# EAGLE board NyanTimer-v4 (EAGLE 9.2.2)
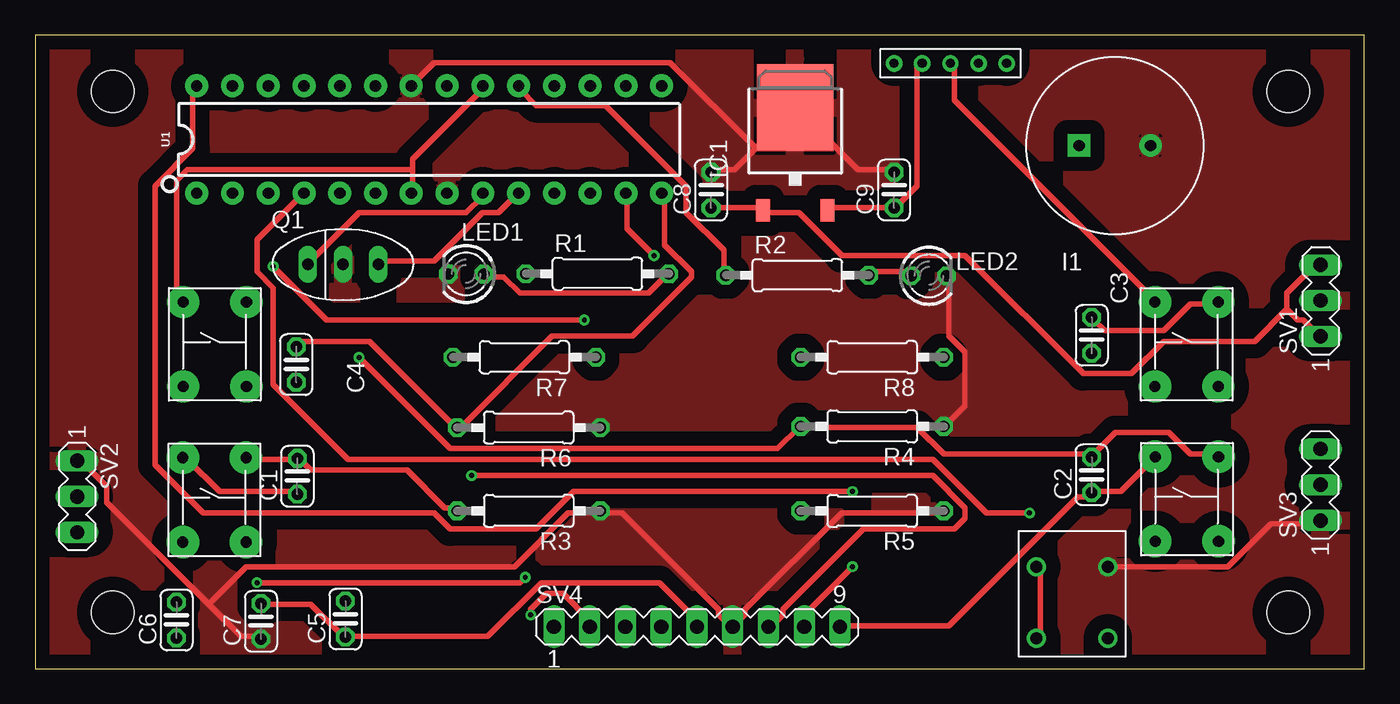
[diagram p0: board, top side]
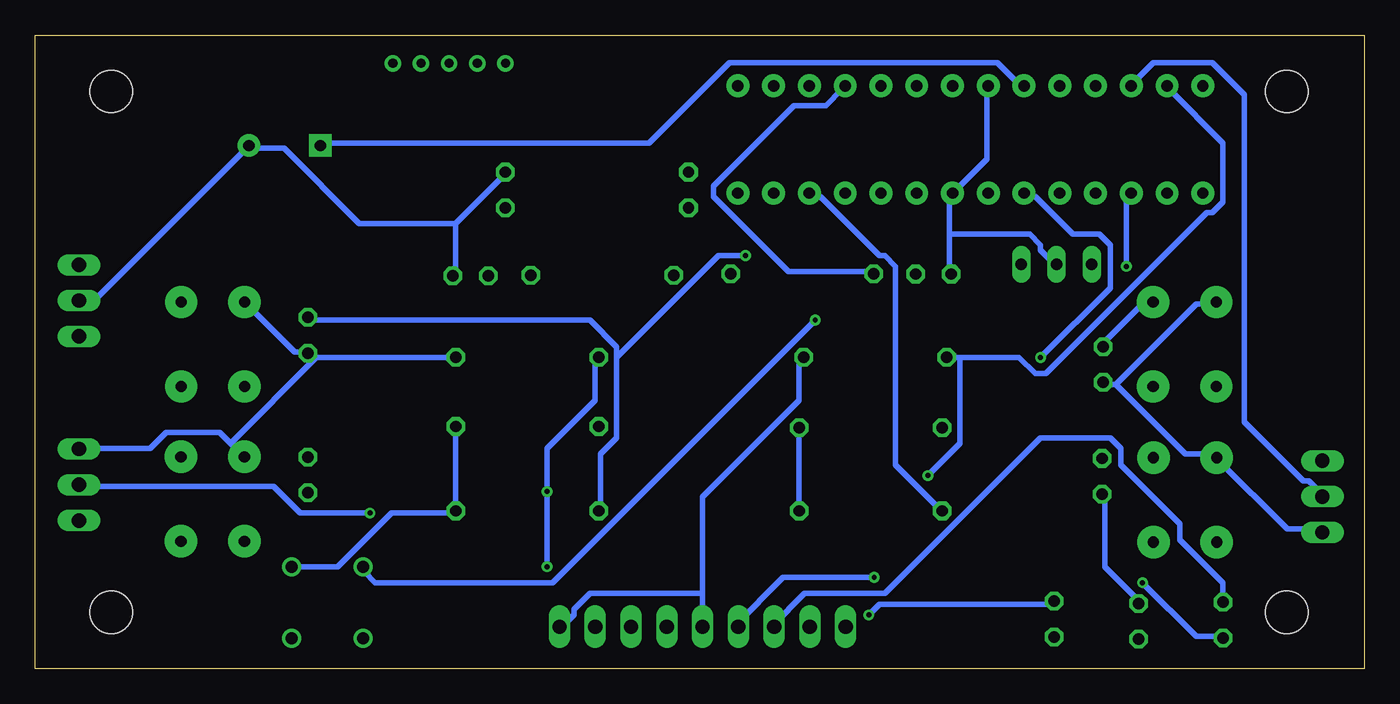
[diagram p1: board, bottom side, seen from below]

Size 94.4 x 45 mm. Coordinates in mm from the lower left corner, seen from the top.
Outline: 0,0 94.4,0 94.4,45 0,45 0,0
Copper layers (1*16): Top 0.035mm / dielectric 1.5mm / Bottom 0.035mm
Design rules "default": minimum track width 6mil, minimum drill 0.35mm, track to track 6mil, track to pad 6mil, pad to pad 6mil, via to via 6mil, smd to smd 6mil, copper to edge 40mil, drill to drill 6mil, minimum pad ring 10mil, minimum via ring 8mil, stop-mask expansion 4mil, vias tented up to drill 0mil, thermal gap 10mil
Net classes: 0 default: width 0.381 mm, clearance 0.381 mm
Holes 3 mm at 5.5,41 5.5,4 89,41 89,4

## Footprints (pad centres in the part's own frame; a part is rotated, then mirrored left to right if it is on the bottom)
C025-024X044 = drill 0.813 octagon: 1 -1.27,0; 2 1.27,0
TACT_SWITCH = drill 0.8 pad 2.3: 1 0,0; 2 4.5,0; 3 0,6; 4 4.5,6
PKM13EPYH4000 = drill 0.8 pad 1.6 square: 1 0,0 | drill 0.8 pad 1.6: 2 5.08,0
TO252 = smd 1 x 1.6: 1 -2.28,-4.8; 2 2.28,-4.8 | smd 5.4 x 6.2: 3 0,2.5
LED3MM = drill 0.813 octagon: A -1.27,0; K 1.27,0
PHONE = drill 0.85: GND 0,-5.08; PIN1 5.08,-5.08; PIN2 0,0; PIN3 5.08,0
CSTLA_T = drill 0.813 long: 1 -2.5,0; 2 0,0; 3 2.5,0
0207/10 = drill 0.813 octagon: 1 -5.08,0; 2 5.08,0
MA03-1 = drill 1.016 long: 1 -2.54,0; 2 0,0; 3 2.54,0
MA09-1 = drill 1.016 long: 1 -10.16,0; 2 -7.62,0; 3 -5.08,0; 4 -2.54,0; 5 0,0; 6 2.54,0; 7 5.08,0; 8 7.62,0; 9 10.16,0
AKIZUKI_SWITCH = drill 0.65: PIN1 2,0; PIN2 4,0; PIN3 6,0; SIDE1 0,0; SIDE2 8,0
DIP28 = drill 0.813 pad 1.626: 1 -16.51,-3.81; 2 -13.97,-3.81; 3 -11.43,-3.81; 4 -8.89,-3.81; 5 -6.35,-3.81; 6 -3.81,-3.81; 7 -1.27,-3.81; 8 1.27,-3.81; 9 3.81,-3.81; 10 6.35,-3.81; 11 8.89,-3.81; 12 11.43,-3.81; 13 13.97,-3.81; 14 16.51,-3.81; 15 16.51,3.81; 16 13.97,3.81; 17 11.43,3.81; 18 8.89,3.81; 19 6.35,3.81; 20 3.81,3.81; 21 1.27,3.81; 22 -1.27,3.81; 23 -3.81,3.81; 24 -6.35,3.81; 25 -8.89,3.81; 26 -11.43,3.81; 27 -13.97,3.81; 28 -16.51,3.81

## Placement (x,y rotation side)
C1  0.1u  [C025-024X044]  18.62,13.66 90 top
C2  0.1u  [C025-024X044]  75.04,13.76 90 top
C3  0.1u  [C025-024X044]  75.04,23.68 90 top
C4  0.1u  [C025-024X044]  18.54,21.6 90 top
C5  1u  [C025-024X044]  22.04,3.52 90 top
C6  1u  [C025-024X044]  10.04,3.44 90 top
C7  0.1u  [C025-024X044]  16.04,3.36 90 top
C8  0.1u  [C025-024X044]  48,34 90 top
C9  0.1u  [C025-024X044]  61,34 90 top
CONNECTOR1  TACT_SWITCH  [TACT_SWITCH]  10.48,8.98 0 top
CONNECTOR2  TACT_SWITCH  [TACT_SWITCH]  79.55,9.04 0 top
CONNECTOR3  TACT_SWITCH  [TACT_SWITCH]  79.53,20.04 0 top
CONNECTOR4  TACT_SWITCH  [TACT_SWITCH]  10.51,20.04 0 top
I1  P-04118_PKM13EPYH4000  [PKM13EPYH4000]  74.14,37.16 0 top
IC1  7815DT  [TO252]  53.98,37.35 0 top
LED1  [LED3MM]  30.6,28.03 180 top
LED2  [LED3MM]  63.48,27.91 0 top
PHN1  PHONE  [PHONE]  76.19,2.14 180 top
Q1  [CSTLA_T]  21.86,28.71 0 top
R1  220  [0207/10]  39.93,28.05 0 top
R2  220  [0207/10]  54.13,27.95 0 top
R3  10k  [0207/10]  35.05,11.2 180 top
R4  10k  [0207/10]  59.45,17.2 180 top
R5  10k  [0207/10]  59.45,11.2 180 top
R6  10k  [0207/10]  35.05,17.12 180 top
R7  10k  [0207/10]  34.75,22.12 180 top
R8  10k  [0207/10]  59.45,22.12 180 top
SV1  [MA03-1]  91.3,26.14 90 top
SV2  [MA03-1]  2.98,12.22 270 top
SV3  [MA03-1]  91.28,13.06 90 top
SV4  [MA09-1]  47,2.97 0 top
SW1  AKIZUKI_SWITCH  [AKIZUKI_SWITCH]  61,43 0 top
U1  328P  [DIP28]  27.98,37.59 0 top

## Library data of the parts
C1-C9 = rcl; SPICEPREFIX: C
CONNECTOR1-CONNECTOR4 = akizuki_tact_switch
I1 = Akizuki
IC1 = linear
LED1 LED2 = led
PHN1 = akizuki_phone_jack
Q1 = murata-resonators
R1-R8 = resistor
SV1-SV4 = con-lstb; OC_FARNELL: unknown; OC_NEWARK: unknown
SW1 = akizuki_switch
U1 = SparkFun-IC-Microcontroller; PROD_ID: IC-09136

## Nets
+5V: C1.1 C2.1 C3.1 C4.1 C5.1 C7.2 CONNECTOR1.3 CONNECTOR2.3 CONNECTOR3.3 CONNECTOR4.3 R7.1 R8.1 SV2.3 SV3.3 SV4.5 SV4.9 SW1.PIN2 U1.7 U1.20
BUZ+: I1.1 U1.23
GND: C7.1 C8.2 C9.2 I1.2 IC1.3 LED1.K LED2.K PHN1.GND Q1.2 R3.1 R4.1 R5.1 R6.1 SV1.2 SV2.1 SV3.1 SV4.6 U1.8 U1.22
LEDG: R2.1 U1.19
LEDR: R1.1 U1.18
N$1: LED1.A R1.2
N$2: LED2.A R2.2
N$3: C5.2 SV4.2
N$4: C6.1 SV4.4
N$5: C6.2 SV4.3
N$6: C8.1 IC1.1 SV1.1 SV1.3
PADL: SV2.2 U1.26
PADR: SV3.2 U1.4
PHONE: PHN1.PIN1 PHN1.PIN3 U1.3
S1: Q1.1 U1.9
S3: Q1.3 U1.10
SCL: R8.2 SV4.8 U1.28
SDA: R7.2 SV4.7 U1.27
SW1: C1.2 CONNECTOR1.4 R3.2 U1.12
SW2: C2.2 CONNECTOR2.4 R4.2 U1.6
SW3: C3.2 CONNECTOR3.4 R5.2 U1.13
SW4: C4.2 CONNECTOR4.4 R6.2 U1.14
VSW: C9.1 IC1.2 SW1.PIN1

## Tracks (layer width: path | path; a pad name or v marks a point on that pad's centre or on a via)
+5V
  Top 0.381: C7.2 16.14,4.57 19.57,4.57 21.85,2.29 C5.1 22.23,2.29 32.14,2.29 35.95,6.1 44.33,6.1 47,3.43 SV4.5 | 26.81,35.43 26.81,36.2 31.76,41.15 U1.20 | 26.81,35.43 26.81,33.91 U1.7 | 26.81,35.43 10.8,35.43 10.04,34.67 10.04,26.67 10.42,26.29 CONNECTOR4.3 | C1.1 18.43,12.57 13.09,12.57 10.8,14.86 CONNECTOR1.3 | CONNECTOR2.3 79.38,14.86 77.1,12.57 75.19,12.57 C2.1 74.81,12.19 74.05,12.19 64.91,3.05 57.29,3.05 SV4.9 | SW1.PIN2 65.29,42.67 65.29,40.39 79.38,26.29 CONNECTOR3.3
  Bottom 0.381: C1.1 18.43,12.19 18.43,7.24 16.14,4.95 C7.2 | 17.66,20.19 18.43,20.19 C4.1 | 17.66,20.19 12.71,15.24 10.8,15.24 CONNECTOR1.3 10.42,14.86 5.47,9.91 3.19,9.91 SV2.3 | 17.66,20.19 11.95,25.91 10.8,25.91 CONNECTOR4.3 | SV4.5 47,5.33 | 47,5.33 47,12.19 40.14,19.05 40.14,22.1 R7.1 | 47,5.33 55,5.33 56.14,4.19 56.14,3.81 56.91,3.05 SV4.9 | 80.53,16 79.77,15.24 CONNECTOR2.3 | 80.53,16 81.29,16.76 85.1,16.76 86.24,15.62 91.2,15.62 SV3.3 | 74.43,22.1 74.81,22.1 C3.1 | 74.43,22.1 64.91,22.1 R8.1 | C3.1 75.19,22.48 75.96,22.48 79.38,25.91 CONNECTOR3.3 | 74.43,22.1 80.53,16 | 74.43,22.1 C3.1
BUZ+
  Bottom 0.381: I1.1 74.05,37.34 50.81,37.34 45.09,43.05 26.05,43.05 24.52,41.53 U1.23
GND
  Top 0.381: 51.19,36.96 53.86,39.62 IC1.3 54.24,39.62 58.43,35.43 60.72,35.43 C9.2 | 51.19,36.96 49.67,35.43 48.14,35.43 C8.2 | 51.19,36.96 45.09,43.05 28.33,43.05 26.81,41.53 U1.22 | 12.33,4.57 5.09,11.81 5.09,12.95 3.19,14.86 SV2.1 | 12.33,4.57 14.62,2.29 15.76,2.29 C7.1 | SV3.1 91.2,10.29 87.77,10.29 84.72,7.24 76.34,7.24 PHN1.GND | R5.1 64.53,11.05 57.29,11.05 50.43,4.19 50.43,3.81 49.67,3.05 SV4.6 49.29,3.05 48.52,3.81 48.52,4.19 41.67,11.05 40.14,11.05 R3.1 39.76,11.05 37.86,11.05 34.05,7.24 15,7.24 12.33,4.57 | LED2.K 64.91,27.81 64.91,23.62 66.05,22.48 66.05,18.67 64.91,17.53 R4.1
  Bottom 0.381: SV1.2 91.2,26.29 90.05,26.29 79.38,36.96 I1.2 79,36.96 76.72,36.96 71.38,31.62 64.53,31.62 | 29.47,30.86 29.47,33.53 U1.8 29.09,33.91 26.81,36.2 26.81,41.15 U1.22 | 29.47,30.86 29.47,28.19 LED1.K | 29.47,30.86 23.76,30.86 23,30.1 23,29.72 22.23,28.96 Q1.2 | 64.53,31.62 64.53,28.19 LED2.K | 64.53,31.62 61.1,35.05 C9.2 | R3.1 40.14,11.43 40.14,16.76 R6.1 | R4.1 64.53,17.14 64.53,11.43 R5.1 64.91,11.05 69.1,11.05 72.91,7.24 75.96,7.24 PHN1.GND
  pour Top (isolate 1.016): 1.28,45.72 95.26,45.72 95.26,0 -1.26,0 -1.26,45.72
LEDG
  Top 0.381: R2.1 48.91,28.19 48.91,29.72 46.24,32.38 46.24,34.29 40.52,40.01 35.57,40.01 34.43,41.15 U1.19
LEDR
  Bottom 0.381: R1.1 35.19,28.19 40.9,28.19 46.24,33.53 46.24,34.29 40.52,40.01 38.24,40.01 37.09,41.15 U1.18
N$1
  Top 0.381: LED1.A 32.14,27.81 33.28,27.81 34.43,26.67 43.57,26.67 44.71,27.81 R1.2
N$2
  Top 0.381: R2.2 59.57,28.19 61.86,28.19 LED2.A
N$3  (via drill 0.35)
  Top 0.381: v35.19,3.81 35.19,4.19 36.33,5.33 37.48,5.33 39.38,3.43 SV4.2
  Bottom 0.381: v35.19,3.81 34.43,4.57 22.23,4.57 C5.2
N$4  (via drill 0.35)
  Top 0.381: v15.76,6.1 34.43,6.1 v34.81,6.48
  Bottom 0.381: v15.76,6.1 11.95,2.29 10.04,2.29 C6.1 | v34.81,6.48 41.28,6.48 44.71,3.05 SV4.4
N$5
  Bottom 0.381: C6.2 10.04,4.95 10.04,6.1 13.09,9.14 13.09,10.29 17.28,14.48 17.28,15.62 18.04,16.38 23,16.38 34.05,5.33 39.76,5.33 42.05,3.05 SV4.3
N$6
  Top 0.381: C8.1 48.14,32.77 51.57,32.77 IC1.1 51.95,32.38 54.24,32.38 57.29,29.34 66.05,29.34 74.43,20.95 77.86,20.95 80.15,23.24 86.62,23.24 88.91,25.53 | 88.91,25.53 89.67,24.77 90.05,24.77 91.2,23.62 SV1.1 | 88.91,25.53 88.91,26.67 91.2,28.96 SV1.3
PADL
  Bottom 0.381: SV2.2 3.19,12.57 3.95,13.34 4.33,13.34 8.52,17.53 8.52,40.77 10.8,43.05 15,43.05 16.52,41.53 U1.26
PADR  (via drill 0.35)
  Top 0.381: v70.62,11.05 67.57,11.05 63.76,14.86 22.23,14.86 16.9,20.19 16.9,27.05 15.76,28.19 15.76,30.48 18.81,33.53 U1.4
  Bottom 0.381: v70.62,11.05 75.58,11.05 77.48,12.95 91.2,12.95 SV3.2
PHONE  (via drill 0.35)
  Top 0.381: PHN1.PIN3 71.38,2.29 71.38,6.86 PHN1.PIN1 | v16.9,28.57 20.71,24.77 v39,24.77
  Bottom 0.381: v16.9,28.57 16.9,33.53 U1.3 | v39,24.77 57.67,6.1 70.24,6.1 71,6.86 PHN1.PIN1
S1
  Top 0.381: Q1.1 19.57,28.96 23,32.38 30.62,32.38 31.76,33.53 U1.9
S3
  Top 0.381: Q1.3 24.52,28.96 28.33,28.96 31.76,32.38 32.9,32.38 34.05,33.53 U1.10
SCL  (via drill 0.35)
  Top 0.381: v58.05,7.24 54.62,3.81 SV4.8 | v58.05,12.57 38.24,12.57 35.57,9.91 29.47,9.91 28.33,11.05 11.95,11.05 8.52,14.48 8.52,34.29 11.19,36.96 11.19,41.15 U1.28
  Bottom 0.381: v58.05,7.24 v58.05,12.57 58.05,15.62 54.62,19.05 54.62,22.1 R8.2
SDA  (via drill 0.35)
  Top 0.381: v31,13.72 63.76,13.72 66.05,11.43 66.05,10.67 65.29,9.91 58.81,9.91 53.1,4.19 53.1,3.81 52.33,3.05 SV4.7
  Bottom 0.381: 28.71,22.1 24.52,22.1 23.38,20.95 22.62,20.95 11.19,32.38 10.8,32.38 10.04,33.15 10.04,37.34 13.85,41.15 U1.27 | 28.71,22.1 29.47,22.1 R7.2 | v31,13.72 28.71,16 28.71,22.1
SW1
  Top 0.381: CONNECTOR1.4 15,14.86 18.43,14.86 C1.2 18.81,14.86 19.57,14.1 26.43,14.1 29.09,11.43 29.86,11.43 R3.2
  Bottom 0.381: U1.12 39.38,33.53 38.62,33.53 34.43,29.34 34.05,29.34 33.28,28.57 33.28,14.48 30.24,11.43 R3.2
SW2  (via drill 0.35)
  Top 0.381: v23,22.1 29.47,15.62 52.72,15.62 54.24,17.14 R4.2 54.62,17.14 62.62,17.14 64.53,15.24 74.81,15.24 C2.2 75.19,15.24 76.72,16.76 80.53,16.76 82.05,15.24 83.96,15.24 CONNECTOR2.4
  Bottom 0.381: v23,22.1 18.04,27.05 18.04,30.1 18.81,30.86 20.71,30.86 23.38,33.53 24.14,33.53 U1.6
SW3  (via drill 0.35)
  Top 0.381: v43.95,29.34 42.05,31.24 42.05,33.53 U1.13 | CONNECTOR3.4 83.96,25.91 82.05,25.91 80.15,24 75.96,24 75.19,24.77 C3.2
  Bottom 0.381: 53.1,22.1 53.1,22.86 55,24.77 74.81,24.77 C3.2 | 53.1,22.1 53.1,16.38 54.24,15.24 54.24,11.43 R5.2 | v43.95,29.34 45.86,29.34 53.1,22.1
SW4
  Top 0.381: C4.2 18.81,23.24 23.76,23.24 29.86,17.14 R6.2 30.24,17.14 36.71,23.62 42.43,23.62 46.62,27.81 46.62,28.19 44.71,30.1 44.71,33.53 U1.14
  Bottom 0.381: C4.2 18.43,23.24 15.38,26.29 CONNECTOR4.4
VSW
  Top 0.381: IC1.2 56.52,32.77 60.72,32.77 C9.1 61.1,32.77 62.62,34.29 62.62,42.67 SW1.PIN1